# EAGLE board v1 (EAGLE 9.6.2)

Size 160 x 100 mm. Coordinates in mm from the lower left corner, seen from the top.
Outline: 0,0 160,0 160,100 0,100 0,0
Copper layers (1*16): Top 0.035mm / dielectric 1.5mm / Bottom 0.035mm
Design rules "default": minimum track width 6mil, minimum drill 0.35mm, track to track 6mil, track to pad 6mil, pad to pad 6mil, via to via 6mil, smd to smd 6mil, copper to edge 40mil, drill to drill 6mil, minimum pad ring 10mil, minimum via ring 8mil, stop-mask expansion 4mil, vias tented up to drill 0mil, thermal gap 10mil

## Footprints (pad centres in the part's own frame; a part is rotated, then mirrored left to right if it is on the bottom)
TAMPI_BC337 = drill 0.813 offset: 1 1.27,0; 2 0,1.905; 3 -1.27,0

## Placement (x,y rotation side)
Q1  BC337  [TAMPI_BC337]  -22.86,2.54 0 top  (outside the outline)
Q2  BC337  [TAMPI_BC337]  -22.86,8.89 0 top  (outside the outline)
Q3  BC337  [TAMPI_BC337]  -22.86,15.24 0 top  (outside the outline)
Q4  BC337  [TAMPI_BC337]  -22.86,21.59 0 top  (outside the outline)

## Library data of the parts
Q1-Q4 = drone